# EAGLE board Robot2 (EAGLE 9.6.2)
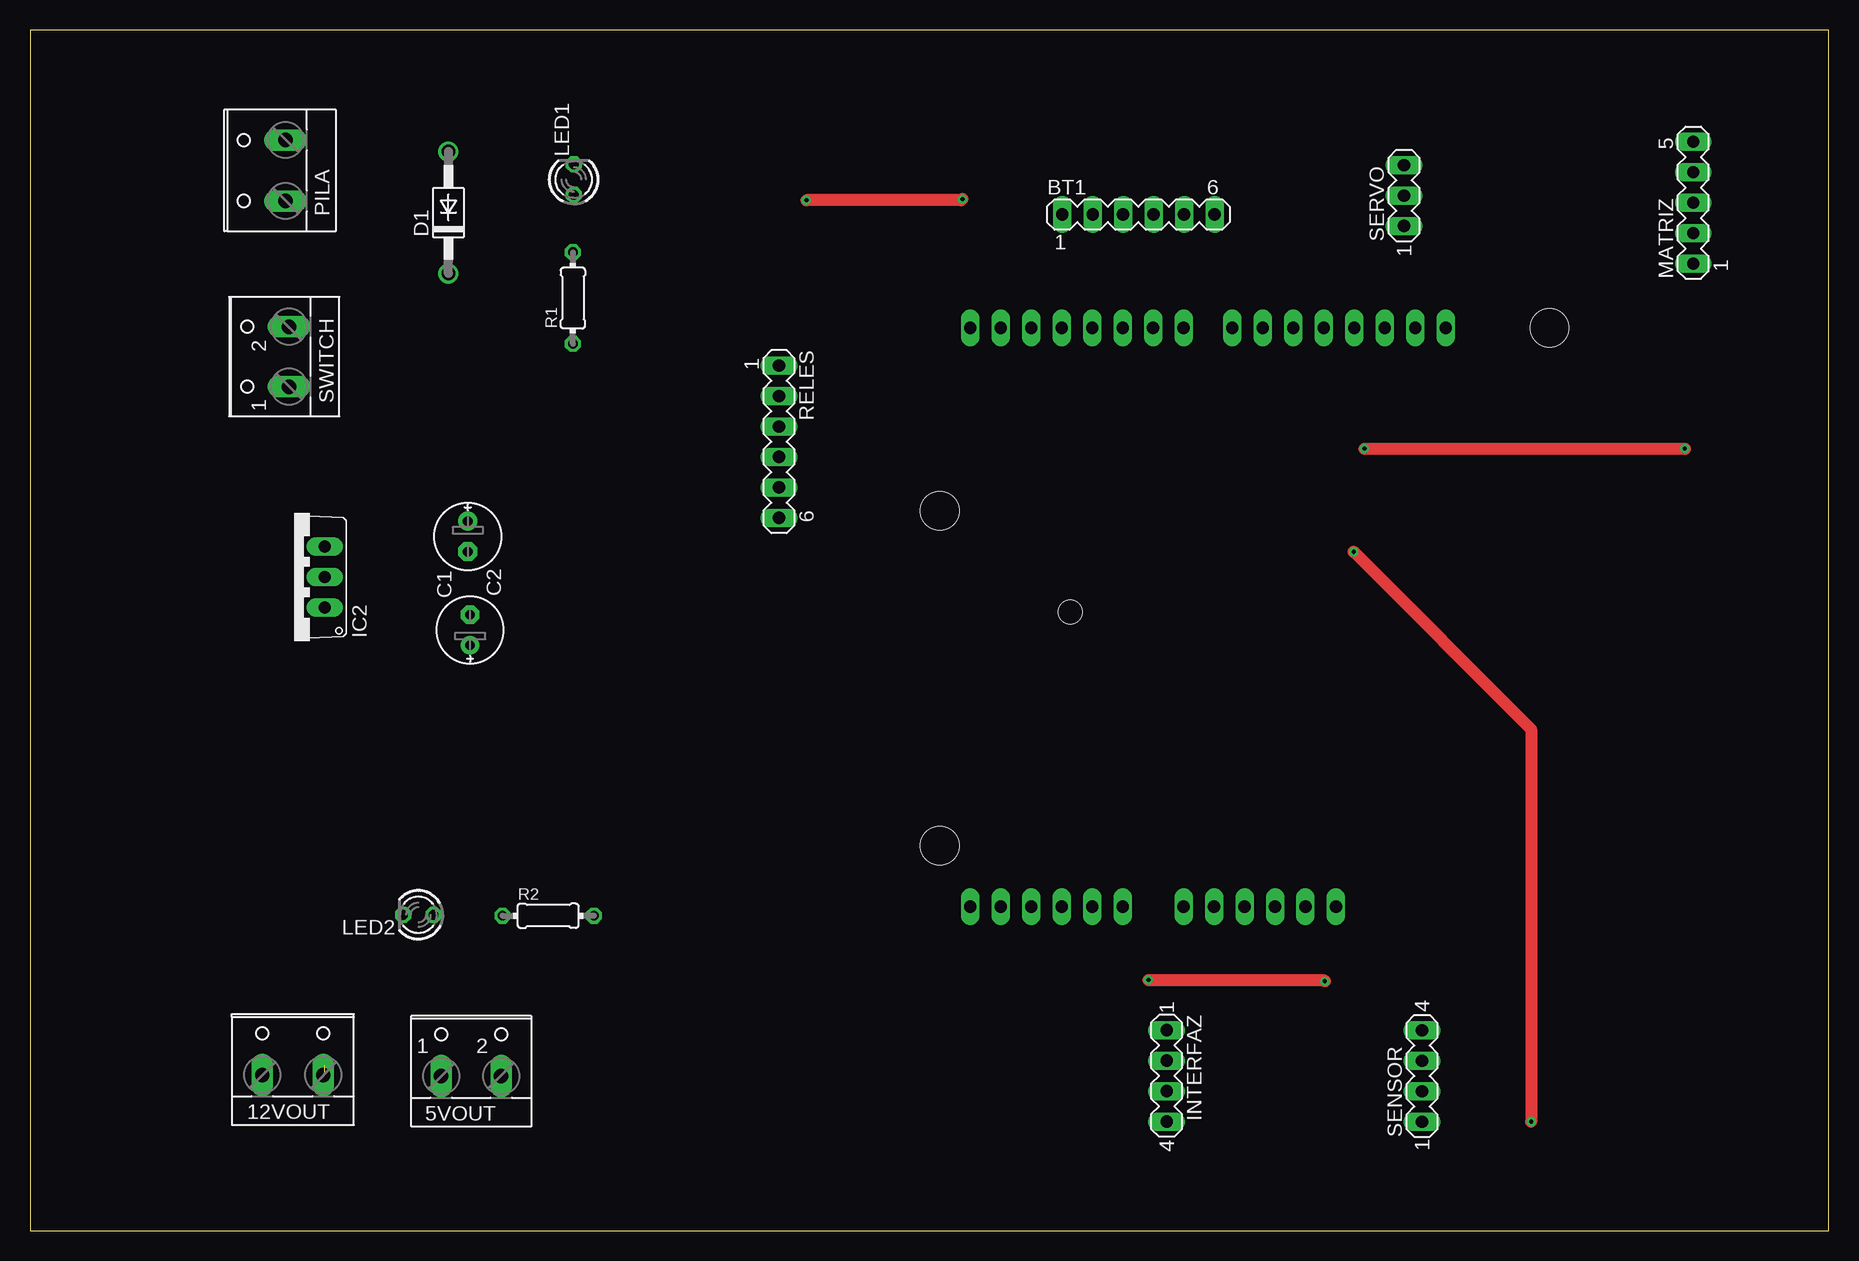
[diagram p0: board, top side]
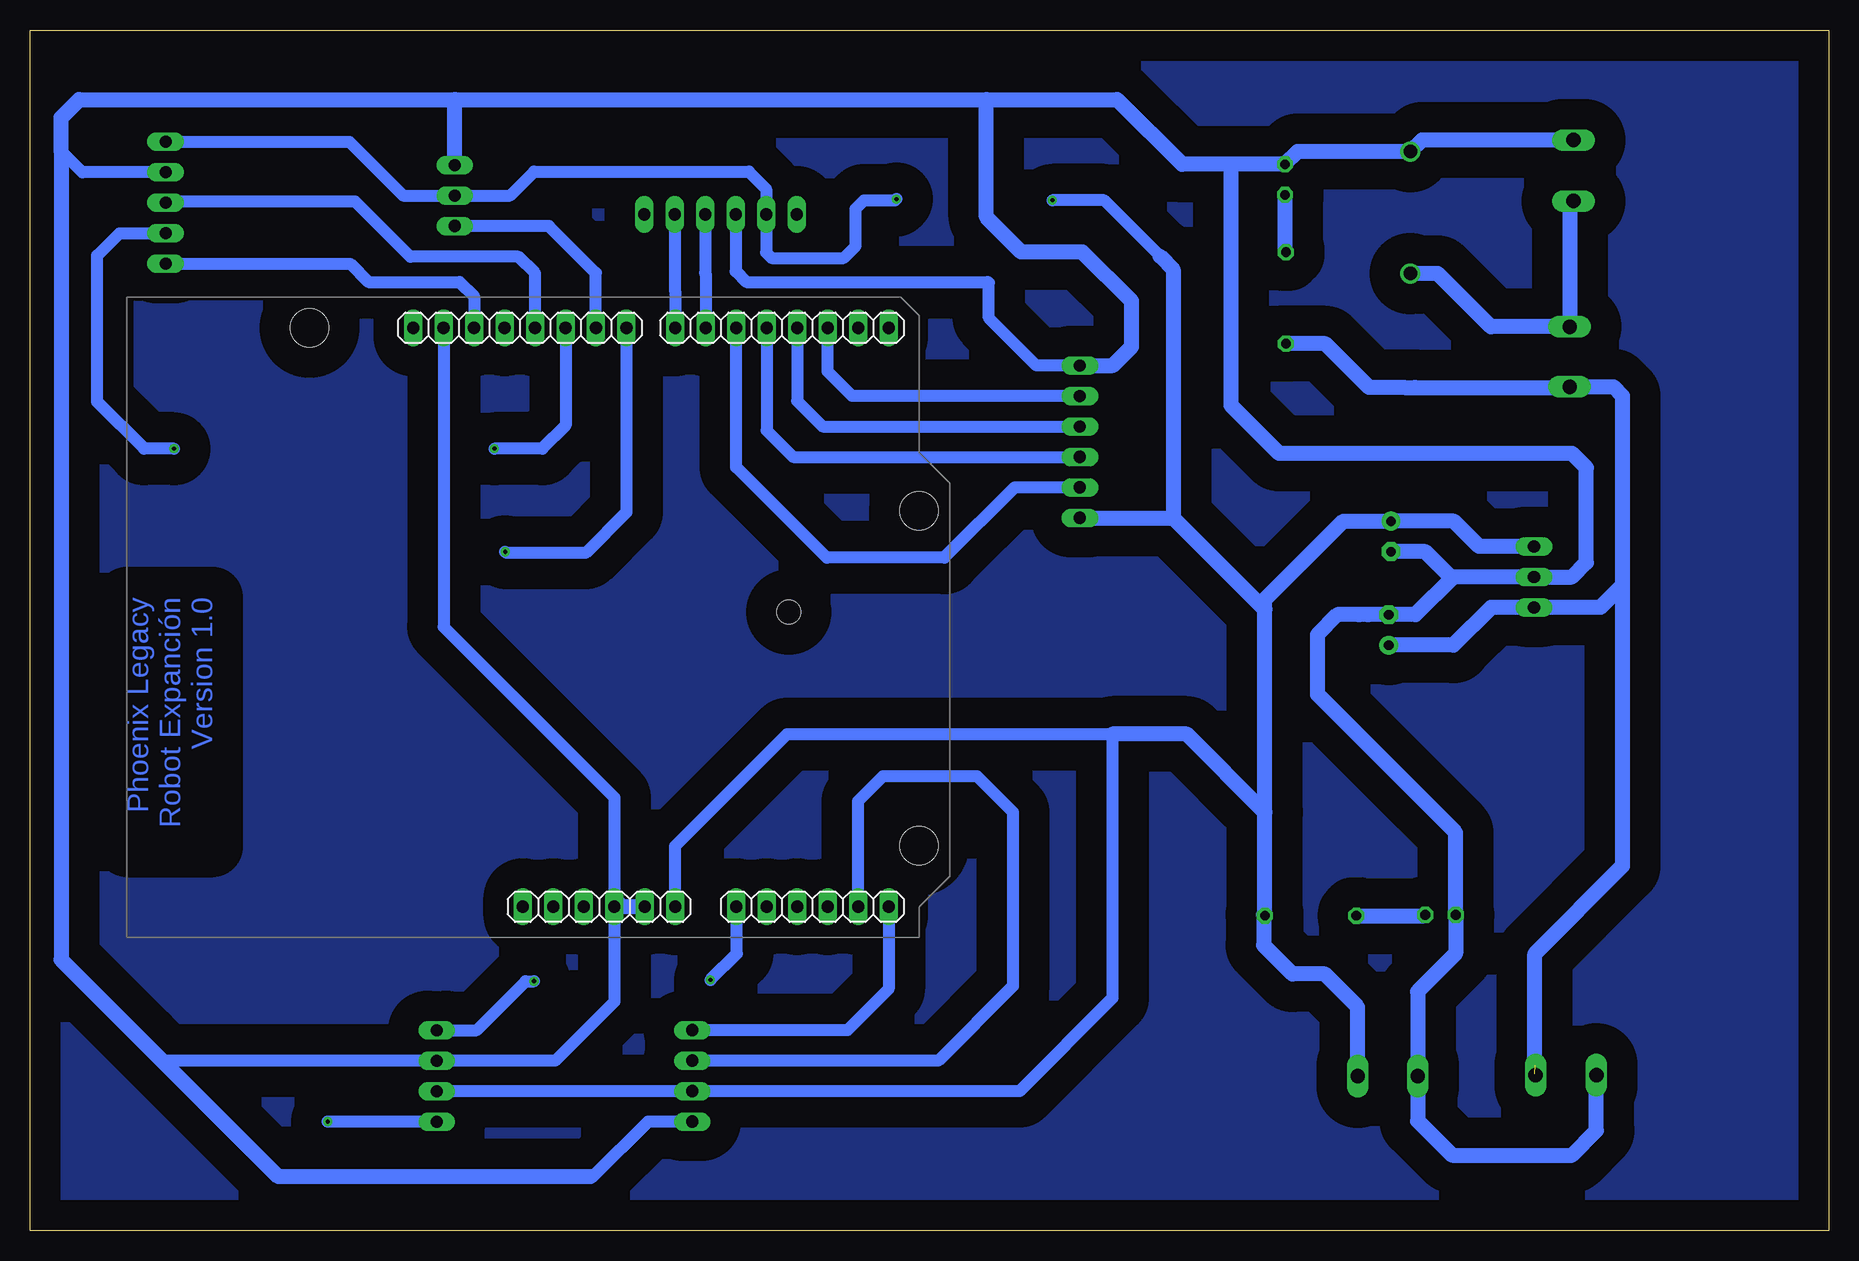
[diagram p1: board, bottom side, seen from below]

Size 149.9 x 100.1 mm. Coordinates in mm from the lower left corner, seen from the top.
Outline: 0,0 149.9,0 149.9,100.1 0,100.1 0,0
Copper layers (1*16): Top 0.035mm / dielectric 1.5mm / Bottom 0.035mm
Design rules "default": minimum track width 6mil, minimum drill 0.35mm, track to track 6mil, track to pad 6mil, pad to pad 6mil, via to via 6mil, smd to smd 6mil, copper to edge 40mil, drill to drill 6mil, minimum pad ring 10mil, minimum via ring 8mil, stop-mask expansion 4mil, vias tented up to drill 0mil, thermal gap 10mil

## Footprints (pad centres in the part's own frame; a part is rotated, then mirrored left to right if it is on the bottom)
W237-102 = drill 1.194 long: 1 -2.5,-1.27; 2 2.5,-1.27
W237-132 = drill 1.194 long: 1 -2.54,-0.635; 2 2.54,-0.635
MA06-1 = drill 1.016 long: 1 -6.35,0; 2 -3.81,0; 3 -1.27,0; 4 1.27,0; 5 3.81,0; 6 6.35,0
E2,5-6E = drill 0.813 pad 1.575: + -1.27,0 | drill 0.813 pad 1.575 octagon: - 1.27,0
DO41-10 = drill 1.118: A 5.08,0; C -5.08,0
ARDUINO2009_1 = drill 1.016 long: 1 33.02,2.54; 2 35.56,2.54; 3 38.1,2.54; 4 40.64,2.54; 5 43.18,2.54; 6 45.72,2.54; 7 50.8,2.54; 8 53.34,2.54; 9 55.88,2.54; 10 58.42,2.54; 11 60.96,2.54; 12 63.5,2.54; 13 63.5,50.8; 14 60.96,50.8; 15 58.42,50.8; 16 55.88,50.8; 17 53.34,50.8; 18 50.8,50.8; 19 48.26,50.8; 20 45.72,50.8; 21 41.656,50.8; 22 39.116,50.8; 23 36.576,50.8; 24 34.036,50.8; 25 31.496,50.8; 26 28.956,50.8; 27 26.416,50.8; 28 23.876,50.8 | hole 3.2: 15.24,50.8; 66.04,35.56; 66.04,7.62 | hole 2: 55.17,27.114
TO220V = drill 1.016 long: 1 -2.54,-2.54; 2 0,-2.54; 3 2.54,-2.54
MA04-1 = drill 1.016 long: 1 -3.81,0; 2 -1.27,0; 3 1.27,0; 4 3.81,0
LED3MM = drill 0.813 octagon: A -1.27,0; K 1.27,0
MA05-1 = drill 1.016 long: 1 -5.08,0; 2 -2.54,0; 3 0,0; 4 2.54,0; 5 5.08,0
0204/7 = drill 0.813 octagon: 1 -3.81,0; 2 3.81,0
MA03-1 = drill 1.016 long: 1 -2.54,0; 2 0,0; 3 2.54,0

## Placement (x,y rotation side)
5VOUT  [W237-102]  36.76,14.16 0 top
12VOUT  [W237-132]  21.9,13.62 0 top
BT1  [MA06-1]  92.36,84.72 0 top
C1  [E2,5-6E]  36.67,50.08 90 top
C2  [E2,5-6E]  36.48,57.88 270 top
D1  1N4004  [DO41-10]  34.87,84.88 90 top
IC1  [ARDUINO2009_1]  141.85,24.47 0 bottom
IC2  786TV  [TO220V]  22.03,54.5 90 top
INTERFAZ  [MA04-1]  94.72,12.91 270 top
LED1  [LED3MM]  45.32,87.63 90 top
LED2  [LED3MM]  32.36,26.33 180 top
MATRIZ  [MA05-1]  138.6,85.7 90 top
PILA  [W237-132]  20.65,88.39 90 top
R1  [0204/7]  45.24,77.76 90 top
R2  [0204/7]  43.18,26.26 0 top
RELES  [MA06-1]  62.41,65.78 270 top
SENSOR  [MA04-1]  116,12.9 90 top
SERVO  [MA03-1]  114.5,86.3 90 top
SWITCH  [W237-102]  20.32,72.86 90 top

## Library data of the parts
5VOUT SWITCH = con-wago-500; MPN: 237-102; OC_FARNELL: unknown; OC_NEWARK: 70K9898
12VOUT PILA = con-wago-508; OC_FARNELL: unknown; OC_NEWARK: unknown
BT1 INTERFAZ MATRIZ RELES SENSOR SERVO = con-lstb; OC_FARNELL: unknown; OC_NEWARK: unknown
C1 C2 = rcl; SPICEPREFIX: C
D1 = diode
IC1 = arduino
IC2 = linear
LED1 LED2 = led
R1 R2 = rcl; SPICEPREFIX: R

## Nets
5V: 5VOUT.2 BT1.2 C2.+ IC1.6 IC2.3 INTERFAZ.3 MATRIZ.5 R2.2 RELES.6 SENSOR.2 SERVO.2
12VIN: D1.C PILA.1 SWITCH.2
12VON: 12VOUT.2 C1.+ IC2.1 R1.1 SWITCH.1
A0: IC1.7 SENSOR.4
CLK: IC1.26 MATRIZ.1
CS: IC1.23 MATRIZ.2
D8: IC1.21 SENSOR.1
D9: IC1.22 SERVO.1
DIN: IC1.24 MATRIZ.3
EN: BT1.1
GND: 5VOUT.1 12VOUT.1 BT1.3 C1.- C2.- D1.A IC1.4 IC1.5 IC1.27 IC2.2 INTERFAZ.4 LED1.K LED2.K MATRIZ.4 PILA.2 RELES.1 SENSOR.3 SERVO.3
IN1: IC1.15 RELES.2
IN2: IC1.16 RELES.3
IN3: IC1.17 RELES.4
IN4: IC1.18 RELES.5
N$1: LED1.A R1.2
N$10: LED2.A R2.1
N$12: IC1.3
N$13: IC1.2
RXD: BT1.5 IC1.20
SCL: IC1.12 INTERFAZ.1
SDA: IC1.11 INTERFAZ.2
STATE: BT1.6
TXD: BT1.4 IC1.19

## Tracks (layer width: path | path; a pad name or v marks a point on that pad's centre or on a via)
5V  (via drill 0.35)
  Top 1.016: v77.7,86 77.6,85.9 v64.7,85.9
  Bottom 1.016: IC1.6 96.13,32.07 86.8,41.4 59.7,41.4 59.7,19.4 67.46,11.64 INTERFAZ.3 SENSOR.2 | v64.7,85.9 60.4,85.9 55.73,81.23 | v77.7,86 77.8,85.9 80.4,85.9 81.1,85.2 81.1,82.1 82.1,81.1 88.1,81.1 88.55,81.55 BT1.2 88.55,86.85 90,88.3 107.9,88.3 109.9,86.3 SERVO.2 118.8,86.3 123.28,90.78 MATRIZ.5
  Bottom 1.27: IC2.3 29.14,57.04 31.25,59.15 C2.+ 40.45,59.15 46.99,52.61 46.99,51.79 | 5VOUT.2 39.26,18.66 42,21.4 44.7,21.4 47.09,23.79 47.09,26.36 R2.2 46.99,34.89 | 59.7,41.4 53.5,41.4 46.99,34.89 | 46.99,34.89 46.99,51.79 | RELES.6 54.63,59.43 | 54.63,59.43 46.99,51.79 | 55.73,81.23 54.63,80.13 54.63,59.43
12VIN
  Bottom 1.27: PILA.1 21.59,85.55 SWITCH.2 28.16,75.36 32.6,79.8 D1.C
12VON  (1 unrouted)
  Bottom 1.27: C1.+ 31.29,48.81 28.14,51.96 IC2.1 19.04,51.96 17.2,53.8 | 12VOUT.2 24.54,13.09 | 17.2,53.8 17.2,69.6 17.96,70.36 SWITCH.1 21.65,70.3 34.5,70.3 35.4,70.3 38.3,70.3 41.95,73.95 R1.1 | 17.2,53.8 17.2,30.4 24.5,23.1 24.5,13.8
A0  (via drill 0.35)
  Top 1.016: v93.2,20.9 107.8,20.9 v107.9,20.8
  Bottom 1.016: SENSOR.4 112.69,16.71 108.6,20.8 v107.9,20.8 | IC1.7 91.05,23.15 91,23.1 v93.2,20.9
CLK
  Bottom 1.016: MATRIZ.1 123.22,80.62 121.7,79.1 114.1,79.1 112.89,77.89 IC1.26
CS  (via drill 0.35)
  Top 1.016: v111.2,65.2 v137.9,65.2
  Bottom 1.016: 105.4,75.14 IC1.23 105.27,67.13 107.2,65.2 v111.2,65.2 | v137.9,65.2 140.4,65.2 144.3,69.1 144.3,81.3 142.44,83.16 MATRIZ.2
D8  (via drill 0.35)
  Top 1.016: v110.3,56.6 125.1,41.8 v125.1,9.1
  Bottom 1.016: SENSOR.1 122.99,9.09 123,9.1 v125.1,9.1 | IC1.21 100.19,59.91 103.6,56.5 110.2,56.5 v110.3,56.6
D9
  Bottom 1.016: IC1.22 102.73,79.83 106.66,83.76 SERVO.1
DIN
  Bottom 1.016: IC1.24 107.81,79.81 109.2,81.2 118.2,81.2 122.8,85.8 138.5,85.8 MATRIZ.3
GND
  Bottom 1.016: 62.5,72.22 RELES.1 66.03,72.13 70,76.1 70,79 70.1,79.1 90.2,79.1 91.09,79.99 BT1.3 | INTERFAZ.4 98.4,9.1 103,4.5 103.2,4.5 | 140.5,15.8 138.87,14.17 SENSOR.3 106.13,14.17 101.21,19.09 IC1.4 101.21,36.11 115.43,50.33 IC1.27 | MATRIZ.4 145.54,88.24 147.3,90
  Bottom 1.27: PILA.2 33.9,90.93 D1.A 44.26,89.96 LED1.K 49.8,88.9 | 31.3,54.5 IC2.2 21.4,54.5 20.2,55.7 20.2,63.6 21.4,64.8 45.8,64.8 49.8,68.8 49.8,88.9 | 31.3,54.5 34.45,51.35 C1.- 38.4,51.35 39.15,51.35 40.95,51.35 42.6,49.7 42.6,44.7 31.09,33.19 LED2.K 31.09,23.11 34.26,19.94 5VOUT.1 34.26,9.16 31.4,6.3 21.4,6.3 19.36,8.34 12VOUT.1 | 31.3,54.5 31.5,54.5 33.61,56.61 C2.- | IC1.4 100.9,27.32 100.59,27.01 IC1.5 | 103.2,4.5 129.2,4.5 140.5,15.8 147.3,22.6 147.3,90 147.3,92.8 145.8,94.3 114.5,94.3 | 114.5,94.3 70.2,94.3 | 70.2,94.3 59.3,94.3 53.9,88.9 49.8,88.9 | SERVO.3 114.5,94.3 | RELES.1 59.67,72.13 58.1,73.7 58.1,77.5 62.2,81.6 67.3,81.6 70.2,84.5 70.2,94.3
IN1
  Bottom 1.016: RELES.2 81.39,69.59 83.43,71.63 IC1.15
IN2
  Bottom 1.016: IC1.16 85.97,69.17 83.85,67.05 RELES.3
IN3
  Bottom 1.016: IC1.17 88.51,66.71 86.31,64.51 RELES.4
IN4
  Bottom 1.016: RELES.5 67.83,61.97 73.7,56.1 83.5,56.1 91.05,63.65 IC1.18
N$1
  Bottom 1.27: R1.2 45.32,81.65 LED1.A
N$10
  Bottom 1.27: LED2.A 33.7,26.26 R2.1
PLACA
  pour Bottom (isolate 2.54): 0.2,100.1 0.2,0.1 0.5,-0.2 150,-0.2 150.3,-0.5 150.3,99.9 0.4,99.9
RXD
  Bottom 1.016: IC1.20 96.13,78.33 96.17,78.37 BT1.5 96.2,84.69
SCL
  Bottom 1.016: IC1.12 78.35,20.15 81.78,16.72 INTERFAZ.1
SDA
  Bottom 1.016: IC1.11 80.89,35.81 78.8,37.9 71,37.9 68,34.9 68,20.4 74.22,14.18 INTERFAZ.2
TXD
  Bottom 1.016: IC1.19 93.59,79.79 93.63,79.83 BT1.4

## Text on the board
Bottom: Phoenix Legacy / Robot Expanción / Version 1.0